# Altium PCB PCB2.PcbDoc
Units mm, origin at the board's own origin, x right, y up, seen from the top; angles counter-clockwise.
Board outline 59.44 x 29.46 mm, 2 copper layers (Top Layer, Bottom Layer); 3 components, 35 nets, 120 pads, 0 vias.
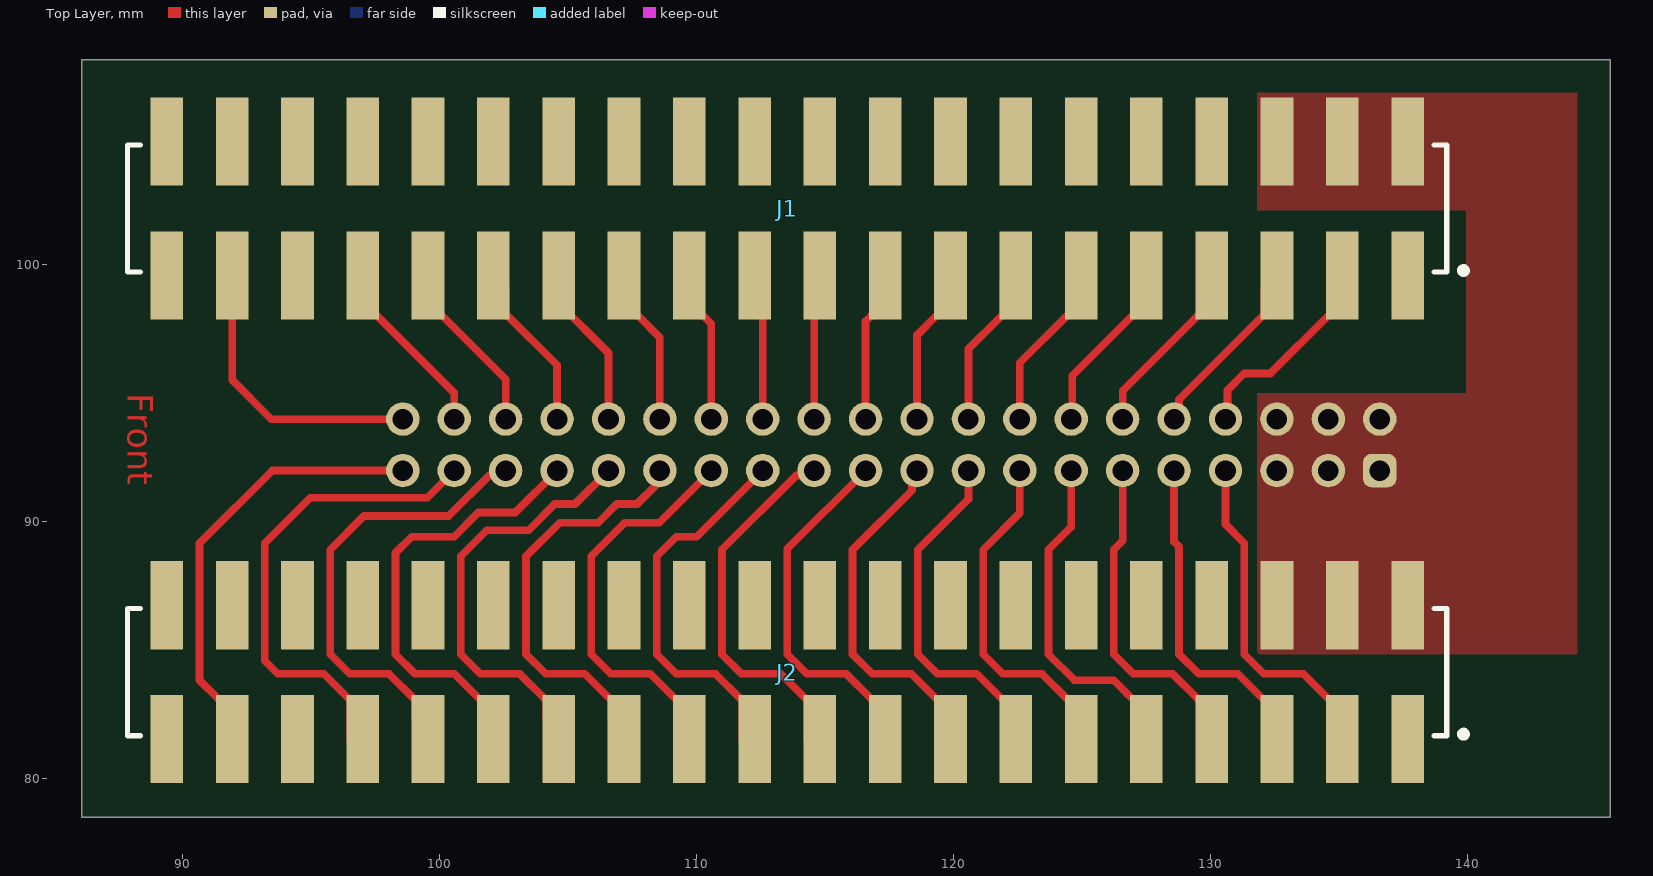
[diagram p0: Top Layer view]
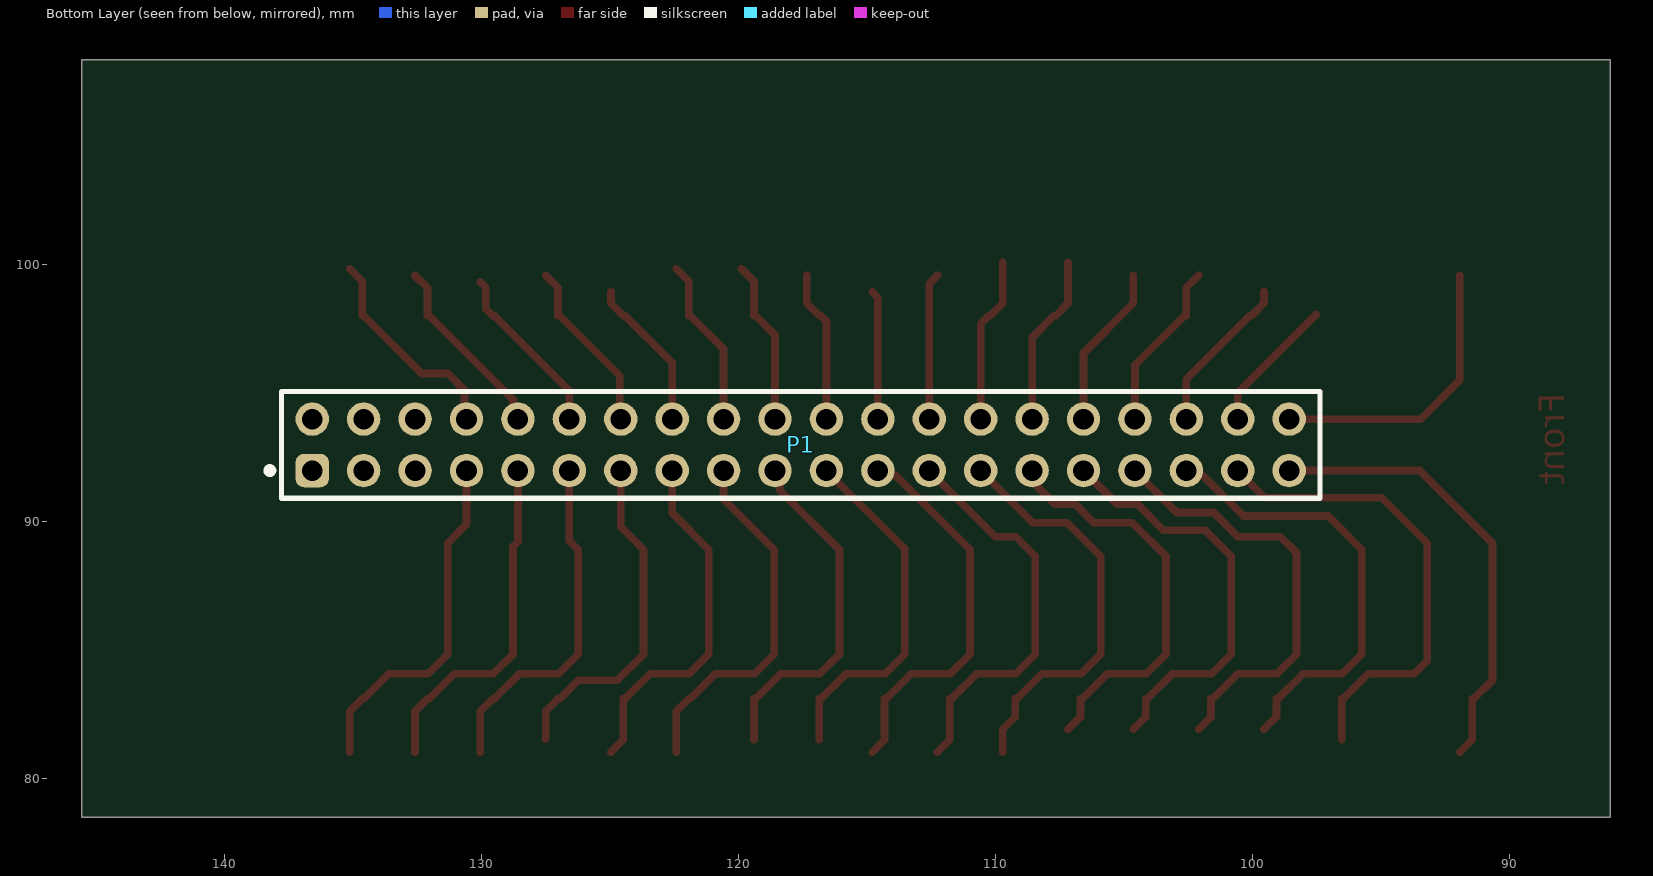
[diagram p1: Bottom Layer view, seen from below]

## Layer stack, top to bottom
Top Solder: solder mask 0.0102, Solder Resist, Dk 3.5
Top Layer: signal copper 0.0356
Dielectric 1: dielectric 0.32, FR-4, Dk 4.8
Bottom Layer: signal copper 0.0356
Bottom Solder: solder mask 0.0102, Solder Resist, Dk 3.5

## Board outline
86.106,107.95 145.542,107.95 145.542,78.486 86.106,78.486

## Design rules (kind name [scope] priority, off if disabled: settings)
Clearance [All] p1: gap=0.254 ignorepadtopadclearanceinfootprint=FALSE
PolygonConnect [All] p1: connectstyle=Direct reliefconductorwidth=0.254 reliefentries=4 polygonreliefangle="90 Angle" airgapwidth=0.254
RoutingVias [All] p1: holewidth=0.711 width=1.27 viastyle="Through Hole" minholewidth=0.711 minwidth=1.27 maxholewidth=0.711 maxwidth=1.27
SolderMaskExpansion [All] p1: expansion=0.102 istentingtop=FALSE
SupplyNets "Schematic Supply Nets" [InNet('GND')] p1: voltage=0.000
Width [All] p1: maxlimit=1 minlimit=0.254 preferedwidth=0.3 minimp=50.000000 maximp=50.000000 favimp=50.000000
30 further rules are at their usual default settings.

## Components (designator, comment, footprint, x,y, rotation, side; value= is the part's Value field where it differs from the comment)
J1 "SSW-120-22-L-D-VS-N" SMTC-SSW-120-22-X-D-VS-N 113.538,102.173 r180 top
J2 "SSW-120-22-L-D-VS-N" SMTC-SSW-120-22-X-D-VS-N 113.538,84.139 r180 top
P1 "62004021121" 62004021121 117.585,92.98 r180 bottom

## Footprints (in the part's own frame and the unit in brackets; to place one, negate y for a bottom-side part, rotate by r counter-clockwise, add the part's x,y. Pads: shape width x height; smd on the part's side, far side on the other; paste and mask are expansions set on the pad)
62004021121 [mm] "2.00 mm THT Dual Pin Header, 40p"
  rrect50% 1.3x1.3 hole 0.8: 1(-19,-1)
  round 1.3 hole 0.8: 2(-19,1) 3(-17,-1) 4(-17,1) 5(-15,-1) 6(-15,1) 7(-13,-1) 8(-13,1) 9(-11,-1) 10(-11,1) 11(-9,-1) 12(-9,1) 13(-7,-1) 14(-7,1) 15(-5,-1) 16(-5,1) 17(-3,-1) 18(-3,1) 19(-1,-1) 20(-1,1) 21(1,-1) 22(1,1) 23(3,-1) 24(3,1) 25(5,-1) 26(5,1) 27(7,-1) 28(7,1) 29(9,-1) 30(9,1) 31(11,-1) 32(11,1) 33(13,-1) 34(13,1) 35(15,-1) 36(15,1) 37(17,-1) 38(17,1) 39(19,-1) 40(19,1)
  silkscreen extent -20.78,-2.07 20.2,2.07, body extent -20,-2 20,2, height 6.05
SMTC-SSW-120-22-X-D-VS-N [mm] "SQ Post Socket, 2x20 Pins, Vertical, 2.54mm Pitch, Female"
  rect 1.27x3.43 smd: 1(-24.13,2.605) 2(-24.13,-2.605) 3(-21.59,2.605) 4(-21.59,-2.605) 5(-19.05,2.605) 6(-19.05,-2.605) 7(-16.51,2.605) 8(-16.51,-2.605) 9(-13.97,2.605) 10(-13.97,-2.605) 11(-11.43,2.605) 12(-11.43,-2.605) 13(-8.89,2.605) 14(-8.89,-2.605) 15(-6.35,2.605) 16(-6.35,-2.605) 17(-3.81,2.605) 18(-3.81,-2.605) 19(-1.27,2.605) 20(-1.27,-2.605) 21(1.27,2.605) 22(1.27,-2.605) 23(3.81,2.605) 24(3.81,-2.605) 25(6.35,2.605) 26(6.35,-2.605) 27(8.89,2.605) 28(8.89,-2.605) 29(11.43,2.605) 30(11.43,-2.605) 31(13.97,2.605) 32(13.97,-2.605) 33(16.51,2.605) 34(16.51,-2.605) 35(19.05,2.605) 36(19.05,-2.605) 37(21.59,2.605) 38(21.59,-2.605) 39(24.13,2.605) 40(24.13,-2.605)
  silkscreen extent -26.43,-2.47 25.66,2.54, body extent -25.65,-3.94 25.65,3.94, height 9.78

## Part data
J1 J2: library part CMP-1023-00465-1, "SQ Post Socket, Surface Mount, Vertical, -55 to 125 degC, 2.54 mm Pitch, 40-Pin, Female, RoHS", Manufacturer=Samtec, Temperature Range="-55 to 125 degC", ComponentLink1Description="Manufacturer URL", ComponentLink1URL=http://www.samtec.com, ComponentLink2Description=Datasheet, ComponentLink2URL=http://www.samtec.com/documents/webfiles/pdf/SSW_SM.PDF, ComponentLink3Description="Package Specification", ComponentLink3URL=http://www.samtec.com/documents/webfiles/cpdf/SSW-1XX-22-XXX-X-XX-XX-X-XX-MKT.pdf, DatasheetVersion=F-214, Mounting Technology="Surface Mount", Orientation=Vertical, PackageDescription=".100 [2.54] Surface Mount Assembly", PackageReference=SSW-120-22-X-D-VS-N, PackageVersion="AS, 1/1997", PartNumber=SSW-120-22-L-D-VS-N, Pitch="2.54 mm", RoHS=True
P1: library part CMP-03913-29930342-2, "62004021121 Conn, Header, 40Pos, 2Row, 2Mm Rohs Compliant: Yes", Contact Resistance=20mΩ, Current Rating=2A, Operating Supply Voltage=200V, Gender=Male, Lead Pitch=2mm, NexarPartId=29930342, Number of Pins=40, Orientation=Vertical

## Nets (pads, with @x,y where several pads share a name; then routed paths per layer and width w, separated by ;. In a path a pad name is that pad's centre, name@x,y a point inside that pad or via, vN(x,y) a via of type N, cw(c..) or ccw(c..) an arc to the next point about the centre after c; other vN are vias at no path point)
GND: J1.2 J1.4 J1.6 J2.2 J2.4 J2.6 P1.1 P1.2 P1.3 P1.4 P1.5 P1.6
NetJ1_3: J1.3 P1.8 | length 8.4
  Top Layer w0.3: P1.8 130.662,94.057 130.662,95.102 131.318,95.758 132.334,95.758 134.579,98.003 134.643,98.003 134.643,99.337 J1.3@135.128,99.822
NetJ1_5: J1.5 P1.10 | length 7.3
  Top Layer w0.3: P1.10 128.776,94.171 128.776,94.74 128.905,94.869 132.039,98.003 132.103,98.003 132.103,99.083 J1.5
NetJ1_7: J1.7 P1.12 | length 6.8
  Top Layer w0.3: P1.12 126.585,95.089 129.499,98.003 129.563,98.003 129.837,98.277 129.837,99.103 J1.7@130.048,99.314
NetJ1_9: J1.9 P1.14 | length 6.8
  Top Layer w0.3: P1.14 124.619,94.014 124.619,95.663 126.959,98.003 127.023,98.003 127.023,99.083 J1.9
NetJ1_11: J1.11 P1.16 | length 6
  Top Layer w0.3: P1.16 122.585,96.169 124.419,98.003 124.483,98.003 124.968,98.488 J1.11@124.968,98.93
NetJ1_13: J1.13 P1.18 | length 6.6
  Top Layer w0.3: P1.18 120.585,96.709 121.879,98.003 121.943,98.003 121.943,99.337 J1.13@122.428,99.822
NetJ1_15: J1.15 P1.20 | length 6.4
  Top Layer w0.3: P1.20 118.585,97.249 119.339,98.003 119.403,98.003 119.403,99.337 J1.15@119.888,99.822
NetJ1_17: J1.17 P1.22 | length 5.9
  Top Layer w0.3: P1.22 116.585,97.789 116.799,98.003 116.863,98.003 117.348,98.488 J1.17
NetJ1_19: J1.19 P1.24 | length 5
  Top Layer w0.3: P1.24 114.585,98.707 J1.19@114.808,98.93
NetJ1_21: J1.21 P1.26 | length 5.7
  Top Layer w0.3: J1.21 112.585,99.251 P1.26
NetJ1_23: J1.23 P1.28 | length 6.5
  Top Layer w0.3: J1.23@109.728,100.076 109.728,98.488 110.213,98.003 110.277,98.003 110.585,97.695 P1.28
NetJ1_25: J1.25 P1.30 | length 6.7
  Top Layer w0.3: J1.25@107.188,100.076 107.188,98.488 107.673,98.003 107.737,98.003 108.585,97.155 P1.30
NetJ1_27: J1.27 P1.32 | length 6.4
  Top Layer w0.3: J1.27 104.648,98.488 106.585,96.551 P1.32
NetJ1_29: J1.29 P1.34 | length 6.7
  Top Layer w0.3: J1.29 102.593,99.083 102.593,98.003 102.657,98.003 104.585,96.075 P1.34
NetJ1_31: J1.31 P1.36 | length 6.2
  Top Layer w0.3: J1.31@99.568,98.93 99.568,98.488 100.053,98.003 100.117,98.003 102.585,95.535 P1.36
NetJ1_33: J1.33 P1.38 | length 5.3
  Top Layer w0.3: J1.33@97.528,98.052 100.585,94.995 P1.38
NetJ1_37: J1.37 P1.40 | length 11.3
  Top Layer w0.3: J1.37 91.948,95.504 93.472,93.98 P1.40
NetJ2_3: J2.3 P1.7 | length 13.8
  Top Layer w0.3: P1.7 130.585,89.887 131.318,89.154 131.318,84.836 132.08,84.074 133.604,84.074 134.579,83.099 134.643,83.099 135.128,82.614 J2.3@135.128,81.026
NetJ2_5: J2.5 P1.9 | length 13.5
  Top Layer w0.3: P1.9 128.585,89.215 128.778,89.022 128.778,84.836 129.54,84.074 131.064,84.074 132.039,83.099 132.103,83.099 132.588,82.614 J2.5@132.588,81.026
NetJ2_7: J2.7 P1.11 | length 13.6
  Top Layer w0.3: P1.11 126.585,89.247 126.238,88.9 126.238,84.836 127,84.074 128.524,84.074 129.499,83.099 129.563,83.099 130.048,82.614 J2.7@130.048,81.026
NetJ2_9: J2.9 P1.13 | length 13.3
  Top Layer w0.3: P1.13 124.585,89.787 123.698,88.9 123.698,84.836 124.714,83.82 126.238,83.82 126.746,83.312 126.751,83.312 126.964,83.099 127.023,83.099 127.508,82.614 J2.9
NetJ2_11: J2.11 P1.15 | length 14.1
  Top Layer w0.3: P1.15 122.585,90.327 121.158,88.9 121.158,84.836 121.92,84.074 123.444,84.074 124.419,83.099 124.483,83.099 124.483,81.511 J2.11@124.968,81.026
NetJ2_13: J2.13 P1.17 | length 14.3
  Top Layer w0.3: P1.17 120.585,90.867 118.618,88.9 118.618,84.836 119.38,84.074 120.904,84.074 121.879,83.099 121.943,83.099 122.428,82.614 J2.13@122.428,81.026
NetJ2_15: J2.15 P1.19 | length 13.8
  Top Layer w0.3: P1.19 118.394,91.789 118.394,91.216 116.078,88.9 116.078,84.836 116.84,84.074 118.364,84.074 119.339,83.099 119.403,83.099 J2.15@119.403,81.511
NetJ2_17: J2.17 P1.21 | length 14
  Top Layer w0.3: P1.21 113.538,88.933 113.538,84.836 114.3,84.074 115.824,84.074 116.799,83.099 116.863,83.099 J2.17@116.863,81.511
NetJ2_19: J2.19 P1.23 | length 15.2
  Top Layer w0.3: P1.23 114.394,91.789 113.887,91.789 110.998,88.9 110.998,84.836 111.76,84.074 113.284,84.074 114.259,83.099 114.323,83.099 114.323,81.511 J2.19@114.808,81.026
NetJ2_21: J2.21 P1.25 | length 15.6
  Top Layer w0.3: J2.21@112.268,81.026 111.783,81.511 111.783,83.099 111.719,83.099 110.744,84.074 109.22,84.074 108.458,84.836 108.458,88.646 109.22,89.408 110.013,89.408 P1.25
NetJ2_23: J2.23 P1.27 | length 16.2
  Top Layer w0.3: J2.23@109.728,81.026 109.728,81.912 109.243,82.397 109.243,83.099 109.179,83.099 108.204,84.074 106.68,84.074 105.918,84.836 105.918,88.646 107.225,89.953 108.559,89.953 P1.27
NetJ2_25: J2.25 P1.29 | length 16.1
  Top Layer w0.3: J2.25@107.188,81.912 106.703,82.397 106.703,83.099 106.639,83.099 105.664,84.074 104.14,84.074 103.378,84.836 103.378,88.646 104.685,89.953 106.188,89.953 106.913,90.678 107.696,90.678 108.394,91.376 108.394,91.789 P1.29
NetJ2_27: J2.27 P1.31 | length 16.4
  Top Layer w0.3: J2.27@104.648,81.912 104.163,82.397 104.163,83.099 104.099,83.099 103.124,84.074 101.6,84.074 100.838,84.836 100.838,88.646 101.854,89.662 103.483,89.662 104.499,90.678 105.283,90.678 P1.31
NetJ2_29: J2.29 P1.33 | length 17
  Top Layer w0.3: J2.29@102.108,81.912 101.623,82.397 101.623,83.099 101.559,83.099 100.584,84.074 99.06,84.074 98.298,84.836 98.298,88.773 98.933,89.408 100.584,89.408 101.525,90.349 102.954,90.349 P1.33
NetJ2_31: J2.31 P1.35 | length 17.6
  Top Layer w0.3: J2.31@99.568,81.912 99.083,82.397 99.083,83.099 99.019,83.099 98.044,84.074 96.52,84.074 95.758,84.836 95.758,88.9 97.074,90.216 100.376,90.216 101.949,91.789 102.394,91.789 P1.35
NetJ2_33: J2.33 P1.37 | length 18.6
  Top Layer w0.3: J2.33@96.543,81.511 96.543,83.099 96.479,83.099 95.504,84.074 93.726,84.074 93.218,84.582 93.218,89.154 94.99,90.926 99.531,90.926 P1.37
NetJ2_37: J2.37 P1.39 | length 17.8
  Top Layer w0.3: J2.37@91.948,81.026 91.463,81.511 91.463,83.099 91.399,83.099 90.678,83.82 90.678,89.154 93.504,91.98 P1.39
pads on no net: J1.1 J1.8 J1.10 J1.12 J1.14 J1.16 J1.18 J1.20 J1.22 J1.24 J1.26 J1.28 J1.30 J1.32 J1.34 J1.35 J1.36 J1.38 J1.39 J1.40 J2.1 J2.8 J2.10 J2.12 J2.14 J2.16 J2.18 J2.20 J2.22 J2.24 J2.26 J2.28 J2.30 J2.32 J2.34 J2.35 J2.36 J2.38 J2.39 J2.40

## Polygon pours and split planes (outlines as drawn)
GND on Top Layer "GND_L01_P001" (solid, pour order 1): 131.826,84.836 140.716,84.836 140.716,94.996 131.826,94.996
GND on Top Layer "GND_L01_P002" (solid, pour order 2): 139.954,94.996 139.954,84.836 144.272,84.836 144.272,106.68 139.954,106.68
GND on Top Layer "GND_L01_P000" (solid, pour order 0): 131.826,102.108 140.97,102.108 140.97,106.68 131.826,106.68

## Other copper
Top Layer:
  text "Front" at 87.884,94.996 h1 r270